# EAGLE board Module-WiFi-M0-v0.3-Board-1 (EAGLE 7.5.0)
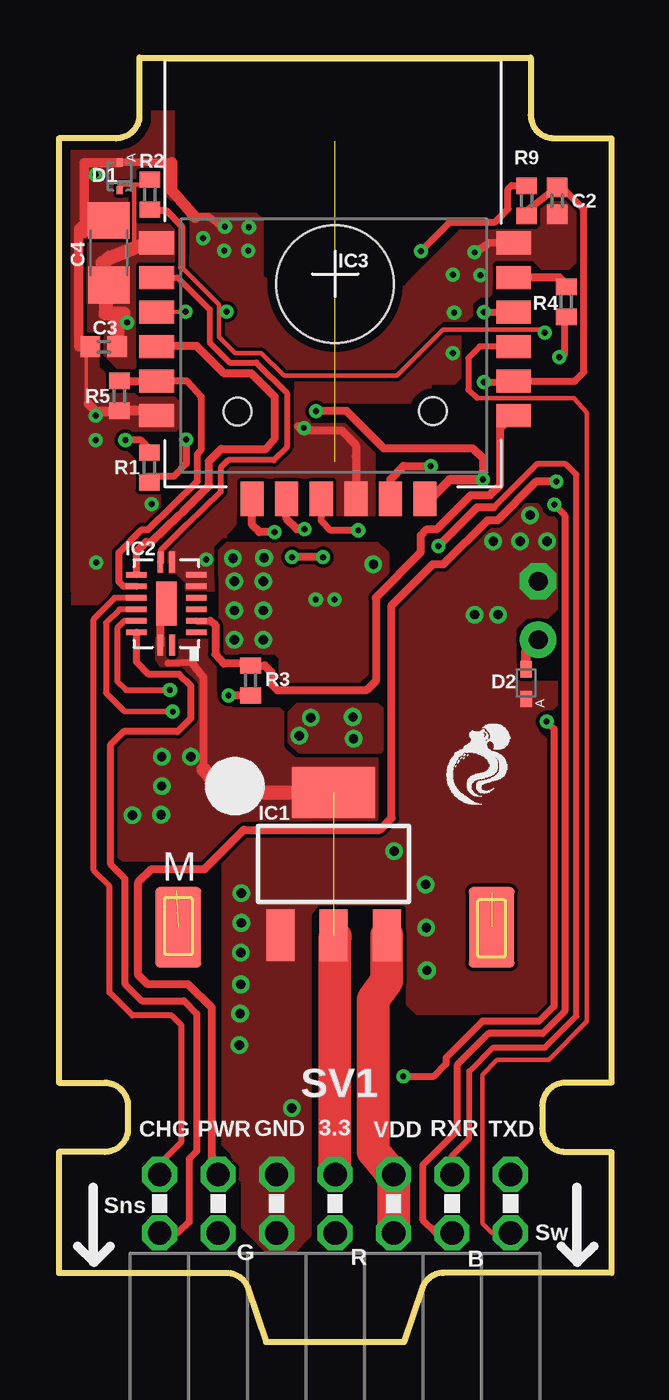
[diagram p0: board, top side]
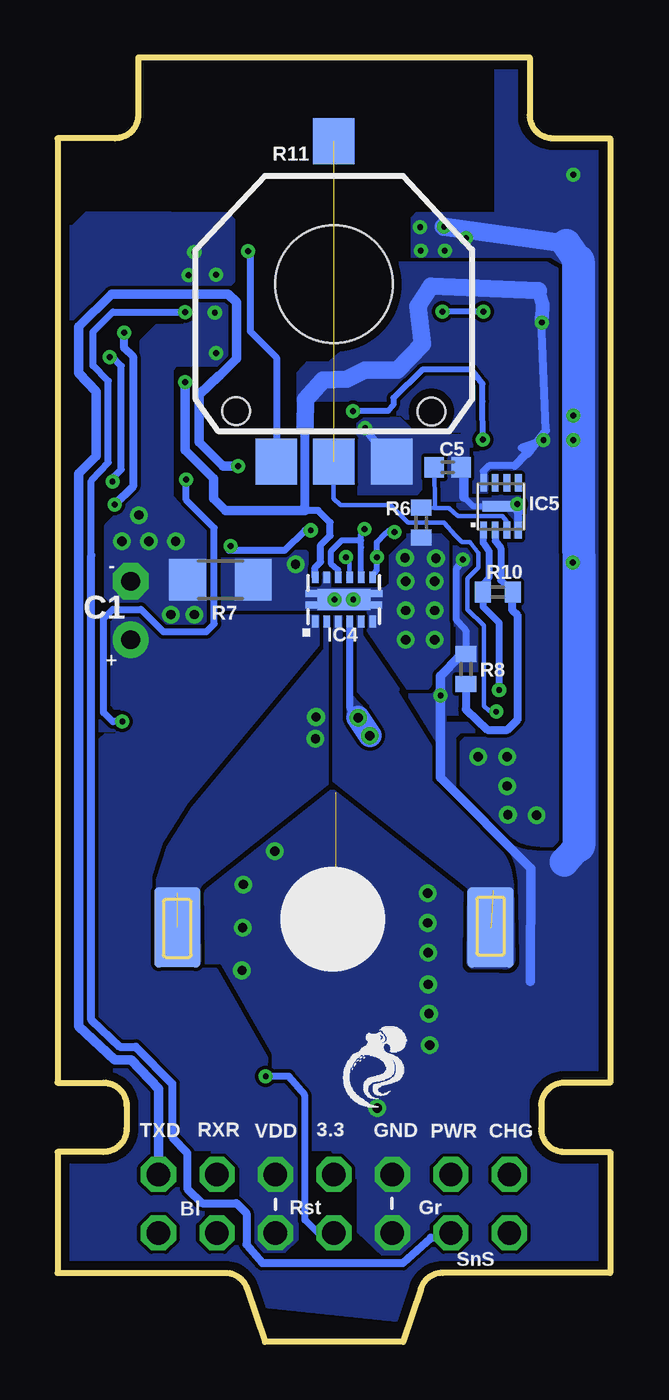
[diagram p1: board, bottom side, seen from below]

Size 24 x 55.75 mm. Coordinates in mm from the lower left corner, seen from the top.
Outline: 0,3 7.28,3 arc-72 8.23,2.32 9,0 15,0 15.77,2.32 arc-72 16.72,3 24,3 24,8.25 22,8.25 arc-90 21,9.25 21,10.25 arc-90 22,11.25 24,11.25 24,52.25 21.5,52.25 arc-90 20.5,53.25 20.5,55.75 3.5,55.75 3.5,53.25 arc-90 2.5,52.25 0,52.25 0,11.25 2,11.25 arc-90 3,10.25 3,9.25 arc-90 2,8.25 0,8.25 0,3
Copper layers (1*16): Top 0.0356mm / dielectric 1.5011mm / Bottom 0.0356mm
Design rules "oshpark-2layer": minimum track width 6mil, minimum drill 10mil, track to track 6mil, track to pad 6mil, pad to pad 6mil, via to via 6mil, smd to smd 6mil, copper to edge 15mil, drill to drill 6mil, minimum pad ring 7mil, minimum via ring 7mil, stop-mask expansion 2.5mil, vias tented up to drill 0mil, thermal gap 10mil
tRestrict: area 5.5,32.4 to 6.8,32.5; area 17.5,39.9 to 17.7,41.1; 119 lines
bRestrict: area 22,35.5 to 22.1,36.7; area 6.7,29.9 to 6.9,31; area 6.9,31 to 6.9,31.5; area 13,33.6 to 13.1,34.8; area 8.8,36.6 to 11.7,36.7; area 6.4,26.9 to 7.1,27.2; area 5.7,38.7 to 6,38.8; 82 lines

## Footprints (pad centres in the part's own frame; a part is rotated, then mirrored left to right if it is on the bottom)
CAP-SLEEP = drill 0.813 pad 1.575: + 1.27,0 | drill 0.813 pad 1.575 octagon: - -1.27,0
0402-CAP = smd 0.85 x 0.9: 1 -0.58,0; 2 0.58,0
1206 = smd 1.6 x 1.8: 1 -1.4,0; 2 1.4,0
SOD-923 = smd 0.36 x 0.25: A -0.6,0; C 0.6,0
SOD523 = smd 0.7 x 0.5: A 0.7,0; C -0.6,0
SOT223 = smd 1.219 x 2.235: 1 -2.311,-3.099; 2 0,-3.099; 3 2.311,-3.099 | smd 3.6 x 2.2: 4 0,3.099
DHVQFN16 = smd 0.24 x 0.9: 1 -0.25,1.8; 8 -0.25,-1.8; 9 0.25,-1.8; 16 0.25,1.8 | smd 0.9 x 0.24: 2 -1.3,1.25; 3 -1.3,0.75; 4 -1.3,0.25; 5 -1.3,-0.25; 6 -1.3,-0.75; 7 -1.3,-1.25; 10 1.3,-1.25; 11 1.3,-0.75; 12 1.3,-0.25; 13 1.3,0.25; 14 1.3,0.75; 15 1.3,1.25 | smd 0.9 x 1.9: EPAD 0,0
WT8266 = smd 1.5 x 1: 1 -7.75,1.35; 2 -7.75,-0.15; 3 -7.75,-1.65; 4 -7.75,-3.15; 5 -7.75,-4.65; 6 -7.75,-6.15; 13 7.75,-6.15; 14 7.75,-4.65; 15 7.75,-3.15; 16 7.75,-1.65; 17 7.75,-0.15; 18 7.75,1.35 | smd 1 x 1.5: 7 -3.6,-9.75; 8 -2.1,-9.75; 9 -0.6,-9.75; 10 0.9,-9.75; 11 2.4,-9.75; 12 3.9,-9.75
DSS12_P9X2 = smd 0.5 x 0.28: 1 -0.959,1.25; 2 -0.959,0.75; 3 -0.959,0.25; 4 -0.959,-0.25; 5 -0.959,-0.75; 6 -0.959,-1.25; 7 0.959,-1.25; 8 0.959,-0.75; 9 0.959,-0.25; 10 0.959,0.25; 11 0.959,0.75; 12 0.959,1.25 | smd 0.9 x 2.3: 13 0,0 | smd 0.305 x 0.61: 13@1 -0.25,1.36; 13@2 0.25,1.36; 13@3 -0.25,-1.36; 13@4 0.25,-1.37 | drill 0.254 pad 0.508: G1 0,0.406; G2 0,-0.406
DFN-8 = smd 0.3 x 0.75: 1 -0.75,-1.025; 2 -0.25,-1.025; 3 0.25,-1.025; 4 0.75,-1.025; 5 0.75,1.025; 6 0.25,1.025; 7 -0.25,1.025; 8 -0.75,1.025 | smd 1.6 x 0.45: PAD 0,0
MOTOR-NO_HOLE = smd 2 x 3.5: M1@1 6.8,0; M2@1 -6.81,0 | smd 2 x 3.5 bottom: M1@2 6.8,0; M2@2 -6.8,0 | smd 0.305 x 0.152: M1@3 6.8,1.5; M2@3 -6.9,1.6
R0402 = smd 0.7 x 0.9: 1 -0.65,0; 2 0.65,0
R1206 = smd 1.6 x 1.803: 1 -1.422,0; 2 1.422,0
ANGLE_SENSOR_MURATA = smd 1.8 x 2: 1 -2.5,-7.7; 2@1 0,-7.7; 2@2 0,6.2; 3 2.5,-7.7 | hole 5.1: 0,0 | hole 1.2: -4.24,-5.51; 4.24,-5.53
FE07-2W = drill 1.016 octagon: 1 -7.62,1.27; 2 -7.62,-1.27; 3 -5.08,1.27; 4 -5.08,-1.27; 5 -2.54,1.27; 6 -2.54,-1.27; 7 0,1.27; 8 0,-1.27; 9 2.54,1.27; 10 2.54,-1.27; 11 5.08,1.27; 12 5.08,-1.27; 13 7.62,1.27; 14 7.62,-1.27

## Placement (x,y rotation side)
C1  47uF, 25V  [CAP-SLEEP]  20.82,31.75 270 bottom
C2  0.1uF  [0402-CAP]  21.64,49.53 270 top
C3  0.1uF  [0402-CAP]  1.96,43.2 180 top
C4  100u  [1206]  2.18,47.28 90 top
C5  0.1uF  [0402-CAP]  7.06,37.96 0 bottom
D1  ESD9X5.0ST5G  [SOD-923]  2.65,50.59 270 top
D2  PMEG3005EB  [SOD523]  20.29,28.6 270 top
IC1  LM1117_3.3VSOT223  [SOT223]  11.94,20.75 0 top
IC2  74HC4051_DHVQFN16  [DHVQFN16]  4.67,32.05 180 top
IC3  WT8266  [WT8266]  12,46.36 0 top
IC4  DRV8835DSSR  [DSS12_P9X2]  11.57,32.23 90 bottom
IC5  LM358-DFN  [DFN-8]  4.75,36.27 0 bottom
M1  Round Motor  [MOTOR-NO_HOLE]  12,18 0 top
R1  30k  [R0402]  3.93,37.96 90 top
R2  3k  [R0402]  3.96,49.79 90 top
R3  30k  [R0402]  8.33,28.72 270 top
R4  30k  [R0402]  22.04,45.15 90 top
R5  3k  [R0402]  2.63,41.07 90 top
R6  30k  [R0402]  8.21,35.57 270 bottom
R7  0.02E, 1W  [R1206]  16.92,33.08 180 bottom
R8  3k  [R0402]  6.27,29.21 270 bottom
R9  30k  [R0402]  20.32,49.53 90 top
R10  30k  [R0402]  4.88,32.55 0 bottom
R11  10k  [ANGLE_SENSOR_MURATA]  12,45.92 0 bottom
SV1  [FE07-2W]  12,6 0 top

## Library data of the parts
C1 D1 IC2 IC3 M1 R11 = 1_ZeroUI
C2 C3 C5 = 1_ZeroUI; PROD_ID: CAP-12416
C4 = SparkFun-Passives
D2 = diode
IC1 = 1_ZeroUI; PROD_ID: VREG-08170
IC4 = 1_ZeroUI; MANUFACTURER_PART_NUMBER: drv8835_dss_12; VENDOR: Texas Instruments
IC5 = 1_ZeroUI; VARIANT: DFN
R1-R10 = rcl
SV1 = con-lsta; OC_FARNELL: unknown; OC_NEWARK: unknown

## Nets
3.3V: C2.1 C3.1 C4.1 D1.C IC1.2 IC1.4 IC2.16 IC2.EPAD IC3.1 IC3.14 IC4.12 IC5.8 R1.2 R2.2 R9.1 SV1.7
/RST: IC3.12 R1.1 SV1.8
CHG_ON: IC2.12 SV1.1
GND: C1.- C2.2 C3.2 C4.2 C5.2 D1.A D2.A IC1.1 IC2.6 IC2.7 IC2.8 IC3.6 IC3.10 IC3.18 IC5.4 IC5.PAD R3.2 R5.1 R7.2 R8.1 R11.3 SV1.5 SV1.6
LED-G: IC3.16 SV1.4
MOT-1: IC4.2 IC4.4 M1.M1@1 M1.M1@2 M1.M1@3
MOT-2: IC4.3 IC4.5 M1.M2@1 M1.M2@2 M1.M2@3
MOT_IN1: IC3.8 IC4.8 IC4.10
MOT_IN2: IC3.7 IC4.7 IC4.9
MOT_IRAW: IC4.6 IC4.11 IC4.13 IC4.13@1 IC4.13@2 IC4.13@3 IC4.13@4 IC4.G1 IC4.G2 R6.2 R7.1
MOT_ISNS: IC2.14 IC5.1 R10.1
MOT_POS: IC2.13 R11.2@1 R11.2@2
MUX_COM: IC2.3 IC3.13 R3.1
MUX_S0: IC2.11 IC3.5 R5.2
MUX_S1: IC2.10 IC3.4
MUX_S2: IC2.9 IC3.2
N$1: IC3.17 R4.2
N$10: C5.1 IC5.3 R6.1
N$17: R9.2 R11.1
N$18: IC5.2 R8.2 R10.2
PROGL/LED-B: IC3.3 R2.1 SV1.12
PWR_EN: R4.1 SV1.3
RXD/LED-R: IC3.9 SV1.11
SW_INT: IC3.15 SV1.14
TXD: IC3.11 SV1.13
VBATT_SENSE: IC2.15 SV1.2
VDD: C1.+ D2.C IC1.3 IC4.1 SV1.9 SV1.10

## Tracks (layer width: path | path; a pad name or v marks a point on that pad's centre or on a via)
3.3V  (via drill 0.25, 0.41)  (1 unrouted)
  Top 0.203: R2.2 3.91,50.24 3.27,50.24 3.28,50.16 | 3.28,50.16 3.25,50.24 3.25,50.22 2.65,50.22 D1.C | 3.28,50.16 3.28,47.59 3.81,47.8
  Top 0.305: 1.91,45.99 1.91,46.84 | 3.73,38.73 3.83,38.73 3.91,38.81 3.58,39.14 v2.9,39.14 | 4.75,29.46 5.77,29.51 | 12,17.59 IC1.2 | v18.47,41.66 19.41,41.66 19.45,41.71 IC3.14 22.41,41.71 22.81,42.1 22.81,49.17 21.86,50.11 C2.1 20.43,49.18 20.42,48.97 20.39,48.94 R9.1
  Top 0.356: C4.1 1.91,45.99 | 3.69,47.66 3.81,47.8 | R1.2 3.73,38.73 | IC2.16 4.42,31.8 IC2.EPAD | 5.77,29.51 6.27,28.85 6.27,24.87
  Top 0.406: C4.1 2.03,46.37 | 2.82,44.66 v2.97,44.25
  Top 0.61: 1.91,46.84 2.21,47.07 3.69,47.66 IC3.1 | 2.03,46.37 2.03,44.65 2.82,44.66 | v2.97,44.25 2.54,44.65 C3.1 | 6.27,24.87 7.16,23.85 IC1.4
  Top 1.422: SV1.7 12,17.59
  Bottom 0.305: IC4.12 12.82,33.61 12.57,33.86 12.57,34.59 12.17,35 12.17,35.57 12.69,36.09 13.26,36.09 13.26,36.14 | 2.97,44.43 v2.97,44.25 | v2.9,39.14 3.86,38.81 3.58,38.53 3.58,38.56 | 4.15,38.04 5.27,38.04 5.51,37.8 5.51,37.21 IC5.8
  Bottom 0.356: v2.97,44.25 3,44.4 2.79,39.57 3.58,38.56 3.63,38.56 4.15,38.04
  Bottom 0.381: 13.26,36.14 13.26,39.75
  Bottom 0.406: 13.26,36.09 16.7,36.09 17.22,36.62 17.22,37.47 18.47,38.71 v18.47,41.66
  Bottom 0.61: 3.12,45.64 2.95,45.03 2.97,44.43
  Bottom 0.762: 13.26,39.75 13.23,40.89 12.47,41.76 11.43,41.78 10.64,42.19 9.25,42.19 8.16,43.32 8.36,44.96 7.78,45.82 3.12,45.64
  other vias: 3.2,22.86 4.47,25.4 4.47,24.13 4.45,22.89 5.74,25.4
  pour Top (no thermals): 13.79,22.68 13.82,22.86 13.82,25.3 10.26,25.3 9.73,25.83 9.73,27.68 8.3,27.7 7.06,29.18 6.63,29.62 6.63,30.51 6.68,30.56 0.1,30.51 0.13,25.53 -0.05,25.78 -0.05,20.42 4.7,20.4 6.14,20.75 8.03,22.63
  pour Bottom (no thermals): -0.2,45.13 -0.15,23.43 arc85 2.81,21.58 arc50 4.65,22.29 6.23,23.92 7.55,25.49 7.44,25.81 7.4,28.65 6.6,29.47 6.02,29.49 6.15,40.89 13.61,40.89 13.61,46.81 2.75,46.81
  pour Top (no thermals): 5.11,48.41 1.09,48.41 1.09,43.83 2.68,42.24 5.31,42.21 5.31,48.39
/RST  (via drill 0.25)
  Top 0.305: v14.96,11.53 16.29,11.53 16.82,12.06 16.82,12.34 18.4,13.92 20.86,13.92 21.5,14.56 21.5,26.61 21.3,26.8 v21.19,26.92 | 16.09,36.41 IC3.12 | v5.54,39.17 5.54,38.12 4.98,37.57 3.85,37.57 R1.1
  Top 0.356: v11.18,40.41 12.5,40.41 14.12,38.79 16.31,38.79 17.98,38.79 18.41,38.35 v18.41,37.44
  Top 0.406: 16.09,36.41 16.09,36.54 16.99,37.44 v18.41,37.44
  Bottom 0.254: v5.54,39.17 5.55,40.82 5.54,41.59 6.03,42.2 8.17,42.2 9.42,40.97 9.42,40.66 9.65,40.41 v11.18,40.41
  Bottom 0.305: SV1.8 12.68,4.73 13.23,5.28 13.26,5.28 13.26,10.69 13.97,11.53 v14.96,11.53 | v21.19,26.92 21.35,26.92 21.6,26.92 22,27.32 22,31.4 21.6,31.8 20.38,31.8 19.41,30.83 17.54,30.83 17.2,31.16 17.2,35.33 18.41,36.55 v18.41,37.44
CHG_ON
  Top 0.254: IC2.12 2.43,32.3 1.52,31.37 1.52,20.47 2.21,19.79 2.21,15.16 3.2,14.17 4.9,14.17 5.33,13.74 5.33,8.69 4.38,7.73 SV1.1
GND  (via drill 0.25, 0.41)
  Top 0.127: 1.28,40.73 1.19,40.82 | 1.19,43 C3.2
  Top 0.152: 1.19,40.82 1.19,43
  Top 0.254: C4.2 1.51,48.92
  Top 0.305: v18.06,47.3 18.08,47.27 | v7.21,48.41 7.09,48.39 6.53,48.84
  Top 0.356: 4.04,40.42 IC3.6 | R5.1 2.53,40.39 | v10.64,39.67 10.39,39.75 10.57,39.57 12.27,39.57 12.9,38.94 12.9,38.43 IC3.10 | IC3.18 18.69,47.7 18.08,47.27 | 6.53,48.84 5.92,48.82 | 4.89,51.18 4.62,51.18 2.62,51.21 D1.A | R3.2 v7.37,28.07
  Top 0.406: C3.2 0.86,43.2 0.86,48.33 1.51,48.92 1.12,48.13 1.11,49.31 1.11,50.73 1.11,51.19 D1.A | 4.04,40.42 R5.1 | 2.53,40.39 1.63,40.39 1.28,40.73
  Top 0.508: 5.92,48.82 4.89,49.99 4.89,51.18
  Bottom 0.254: IC5.PAD 5.94,36.27 6.35,36.68
  Bottom 0.305: v6.4,33.96 6.69,33.54 6.69,31.36 6.35,30.99 6.27,30.89 R8.1
  Bottom 0.356: v10.64,39.67 10.24,39.12 9.88,38.83 | IC5.4 4,36.03 4.24,36.27 IC5.PAD
  Bottom 0.406: R11.3 9.88,38.83 9.75,38.1 | 3.48,15.65 3.45,20.55 7.37,24.51 v7.37,28.07 7.37,28.91 6.55,29.74 6.22,29.88 R8.1 | 6.35,36.68 6.35,38.08 C5.2 | v4.04,36.37 4.01,36.37 4,36.03
  Bottom 0.813: v7.21,48.41 1.91,47.68
  Bottom 1.27: 1.91,47.68 1.4,46.91 | 1.37,21.54 1.99,20.84
  Bottom 1.422: 1.4,46.91 1.37,21.54
  other vias: 7.92,19.48 15.99,16.13 7.9,15.52 14.57,21.3 7.87,14.25 7.9,16.89 7.92,18.19 17.12,46.33 18.31,46.3 17.12,42.93 8.26,48.39 8.23,47.37 7.19,47.37 15.93,19.86 20.47,35.89 21.21,34.75 1.6,39.14 1.6,50.67 1.63,33.83 6.27,47.9 10.12,10.15 7.85,12.88 15.96,17.98 18.87,34.75 17.17,44.68 1.6,40.21 20.04,34.75 18.06,31.57 19.08,31.57
  pour Bottom (rank 6, no thermals): 0,0 24.13,2.54 24.13,58.42 0,55.88
  pour Top (rank 6, no thermals): 7.11,3.81 11.15,3.81 11.25,3.83 22.58,3.95 21.73,32.84 14.61,32.82 14.58,23.09 13.26,22 7.11,22
  pour Top (rank 2, no thermals): 24.56,39.32 15.44,39.32 15.44,29.29 24.56,29.29
  pour Top (isolate 0.025, rank 2, no thermals): -5.08,53.34 30.48,53.34 30.53,35.15 15.32,35.03 7.47,35.03 6.86,34.42 6.83,34.42 6.83,31.34 -5.03,31.34
LED-G  (via drill 0.25)
  Top 0.305: v18.47,44.7 IC3.16
  Bottom 0.305: 22.53,34.14 22.53,37.39 21.79,38.17 21.79,41.71 22.45,42.37 22.45,43.85 21.6,44.7 v18.47,44.7
  Bottom 0.356: 22.53,34.14 22.53,13.97 21.3,12.81 20.6,12.81 19.02,11.2 19.02,8.89 18.36,8.2 18.36,6.66 17.73,6.02 16.23,6.02 15.8,5.59 15.8,4.22 15.11,3.43 9.01,3.43 7.79,4.52 7.1,4.55 SV1.4
MOT-1  (via drill 0.41)  (2 unrouted)
  Bottom 0.305: IC4.4 11.32,27.53 v10.95,27.1
  Bottom 0.356: M1.M1@2 18.8,18.03
  Bottom 1.016: v10.95,27.1 v10.44,26.31
  other vias: 12.8,26.19 12.78,27.13
  pour Bottom (rank 3, no thermals): 12.19,31.57 12.19,24.31 17.71,19.9 arc-52 17.89,19.54 17.84,16.54 arc90 18.07,16.3 19.53,16.3 arc89 19.74,16.58 19.8,20.02 arc17 19.73,20.36 19.45,21.3 arc20 19.06,22.06 15.49,26.82 12.58,30.2 12.5,30.5 12.5,31.57
  pour Top (rank 4, no thermals): 9.88,27.69 14.2,27.69 14.2,25.37 9.88,25.4
  pour Bottom: 11.23,28.07 10.64,27.43 11.25,27.08 arc120 11.39,27.16 11.39,28.12 11.25,28.1 arc81
MOT-2  (2 unrouted)
  Bottom 0.254: 5.4,18 5.5,18
  pour Bottom (rank 2, no thermals): 6.15,19.72 6.17,16.63 arc-89 5.97,16.25 4.65,16.24 arc-91 4.19,16.56 4.24,19.84 4.33,20.37 arc-19 4.7,21.23 10.67,30.61 10.67,31.52 11.05,31.52 12,31.54 12,24.36
MOT_IN1  (via drill 0.25)
  Top 0.356: v10.67,35.28 10.34,35.28 9.9,35.72 IC3.8
  Bottom 0.254: IC4.10 11.82,33.51 12.12,33.76 12.12,34.34 11.66,34.8 10.82,34.8 10.82,35.08 | 10.82,35.08 v10.67,35.28 | IC4.8 10.82,34.49 10.82,35.08
MOT_IN2  (via drill 0.25)
  Top 0.356: v11.48,34.06 v10.13,34.06 | v9.37,35.15 8.71,35.15 8.4,35.47 IC3.7
  Bottom 0.203: IC4.7 10.32,33.27 | IC4.9 11.32,33.95 v11.48,34.06
  Bottom 0.254: 10.32,33.27 10.13,33.5 v10.13,34.06 10.14,34.72 9.75,35.1 9.63,35.2 arc-37 v9.37,35.15
MOT_IRAW  (via drill 0.41)
  other vias: 13.67,33.76 8.92,34.04 8.89,30.48 8.89,33.02 7.57,34.01 7.62,33.02 7.62,31.75 8.89,31.75 7.62,30.48
  pour Bottom (no thermals): 17.17,35.05 6.73,35.08 6.81,34.32 6.65,29.74 6.85,29.74 7.68,28.93 7.89,28.31 8.98,28.25 10.49,30.71 10.49,31.8 17.2,31.8
  pour Top (no thermals): 15.27,34.92 7.49,34.92 6.99,34.37 7.04,29.77 8.51,28.02 14.45,28.04 14.45,31.88 15.33,32.72
MOT_ISNS  (via drill 0.25)
  Top 0.254: IC2.14 2.85,31.3 2.54,30.99 2.54,28.68 2.92,28.3 v4.83,28.3
  Bottom 0.203: 5.51,35.23 IC5.1
  Bottom 0.305: R10.1 5.51,32.2 5.51,31.9 4.83,31.22 v4.83,28.3 | 5.53,32.85 5.26,33.2 5.26,34.31 5.51,34.7 5.51,35.23
  Bottom 0.356: R10.1 5.53,32.85
MOT_POS  (via drill 0.25)  (1 unrouted)
  Top 0.254: IC2.13 2.64,31.8 2.06,31.22 2.06,28.17 2.85,27.38 v4.95,27.36
  Bottom 0.203: v4.95,27.36 5.26,27.38 5.49,27.61 5.49,31.09 6.2,31.8 6.2,33.15 5.72,33.6 5.73,34.25 6.1,34.72 6.45,34.72 6.73,35 7.21,35.56 8.79,35.56 9.55,36.32 11.72,36.32 12.01,36.62 12.01,38.21
  Bottom 0.305: 11.99,38.23 R11.2@1
  Bottom 0.356: 12.01,38.21 R11.2@1
MUX_COM
  Top 0.305: IC2.3 6.57,31.3
  Top 0.356: 6.57,31.3 6.81,31.11 6.81,29.84 7.16,29.44 8.25,29.44 8.28,29.46 R3.1 8.94,29.36 9.22,29.08 9.22,28.57 9.5,28.3 13.38,28.3 13.77,28.69 13.77,32.31 15.72,34.29 15.72,35.01 16,35.28 16.42,35.28 17.89,36.75 18.73,36.75 19.18,37.2 19.18,39.67 19.96,40.49 20.24,39.99 IC3.13
MUX_S0
  Top 0.305: IC2.11 2.81,32.8 2.62,32.99 2.62,34.27 3.61,35.26 3.85,35.26 arc45 3.87,35.26 6.02,37.36 6.02,38.53 6.2,38.76 6.2,41.02 5.56,41.71 IC3.5
  Top 0.356: R5.2 IC3.5
MUX_S1
  Top 0.305: IC2.10 3.37,34.31
  Top 0.356: 3.37,34.31 3.79,34.72 4.01,34.72 5.24,35.89 5.38,36.02 6.53,37.16 6.53,37.47 6.53,38.23 7.06,38.76 8.99,38.76 9.39,39.23 9.39,41.02 8.37,42.04 7.19,42.04 5.99,43.23 4.28,43.23 IC3.4
MUX_S2
  Top 0.254: IC3.2 5.16,46.21 6.55,44.81 6.55,43.38 7.42,42.52 8.58,42.52 9.91,41.19 9.91,38.85 9.34,38.28 7.36,38.28 7.04,37.95 7.04,36.91 5.56,35.48 4.45,34.37 4.45,33.87
  Top 0.305: 4.45,33.87 IC2.9
N$1
  Top 0.356: R4.2 22.06,45.88 21.74,46.2 IC3.17
N$10
  Bottom 0.203: IC5.3 4.5,35.61 4.67,35.84 6.62,35.84 7.01,36.2 7.63,36.2 | 7.63,36.2 R6.1 | C5.1 7.62,36.27 7.63,36.2
N$17  (via drill 0.25)
  Top 0.305: v15.72,47.35 16.99,48.62 18.95,48.62 19.51,49.17 19.51,50.04 19.66,50.19 R9.2
  Top 0.406: R9.2
  Bottom 0.305: 15.64,47.31 15.64,43.87 14.5,42.73 R11.1
  Bottom 0.406: v15.72,47.35 15.64,47.31
N$18
  Bottom 0.305: IC5.2 5,34.77 4.75,34.47 4.75,33.06 R10.2
  Bottom 0.356: R8.2 6.27,27.45 5.33,26.57 4.47,26.57 4.01,27.03 4.01,31.52 4.24,31.75 4.24,32.54 R10.2
PROGL/LED-B  (via drill 0.25)
  Top 0.203: 21.16,43.94 16.69,43.94 14.68,41.94 9.78,41.94 8.79,42.93 7.65,42.93 6.96,43.62 6.96,44.73 | 6.96,44.73 6.96,45.03 5.33,46.66 | IC3.3 v5.51,44.73 | v7.29,44.73 6.96,44.73
  Top 0.254: 4.15,44.93 IC3.3
  Top 0.305: 4.1,49.12 4.65,49.12 5.33,48.44 5.33,46.66 | SV1.12 16.38,4.73 15.82,5.28 15.82,7.69 17.3,9.16 17.3,12.02 18.67,13.39 21.02,13.39 21.97,14.34 21.97,35.89 v21.51,36.35 | v21.11,43.81 21.18,43.81 21.16,43.94
  Top 0.356: R2.1 4.1,49.12
  Bottom 0.254: v5.51,44.73 v7.29,44.73
  Bottom 0.356: v21.51,36.35 20.73,37.13 20.73,42.77 21.11,43.13 v21.11,43.81
PWR_EN  (via drill 0.25)
  Top 0.305: v21.74,42.75 arc99 21.97,42.95 21.97,44.25 22.1,44.32 21.95,44.39 R4.1
  Top 0.356: SV1.3 6.92,7.76 6.66,8.03 6.66,14.5 5.61,15.52 3.86,15.52 3.45,15.93 3.45,19.96 4.04,20.52 6.34,20.52 8.03,22.23 13.95,22.23 14.45,22.73 14.45,31.97 16.24,33.76 16.71,33.76 18.62,35.66 19.05,35.66 20.73,37.34 v21.61,37.34
  Bottom 0.305: v21.61,37.34 21.52,37.44 21.57,37.54 21.23,37.87 21.23,42.37 21.64,42.8 v21.74,42.75
RXD/LED-R  (via drill 0.25)
  Top 0.254: SV1.11 17.07,8.07 17.83,8.83 17.83,11.75 18.86,12.78 21.11,12.78 22.48,14.14 22.48,37.64 22.02,38.1 20.75,38.1 19.71,37.05 18.88,36.22
  Top 0.305: v13.01,35.23 11.81,35.23 11.4,35.64 11.4,36.47 IC3.9
  Top 0.356: 18.88,36.22 18.16,36.22 v16.48,34.54
  Bottom 0.305: v16.48,34.54 16.56,34.37 14.12,34.37 13.26,35.23 v13.01,35.23 13.01,35.2
SW_INT
  Top 0.203: 18.16,40.97 22.38,40.97 22.94,40.33 22.94,13.92 21.29,12.24 19.03,12.24 18.39,11.6 18.39,5.16 18.82,4.73 SV1.14
  Top 0.254: IC3.15 18.29,43.21 17.78,42.7 17.78,41.33 18.16,40.97
TXD  (via drill 0.25)
  Top 0.356: IC3.11 14.4,37.44 14.96,38.02 v16.15,38.02
  Top 0.406: IC3.11 14.4,36.12
  Bottom 0.305: 17.86,39.62 17.86,39.65
  Bottom 0.406: SV1.13 19.62,10.98 20.8,12.24 21.51,12.24 23.09,13.69 23.09,37.69 22.33,38.46 22.33,41.25 23.09,42.06 23.09,44.06 21.66,45.49 16.59,45.49 16.23,45.13 16.23,42.67 16.97,41.94 16.99,41.94 17.86,41.12 17.86,39.65 | v16.15,38.02 16.81,38.02 17.86,39.07 17.86,39.62
VBATT_SENSE
  Top 0.305: IC2.15 3.38,29.52 3.91,28.98 5.23,28.98 5.74,28.47 5.74,27.08 5.16,26.49 2.82,26.49 2.23,25.91 2.23,20.75 2.87,20.12 2.87,15.54 3.61,14.81 5.44,14.81 5.99,14.25 5.99,8.28 5.66,7.95 5.66,5.21 5.18,4.75 4.4,4.75
  Top 0.356: 4.4,4.75 SV1.2
VDD
  Top 0.406: D2.C 20.3,29.98 C1.+
  Top 1.422: IC1.3 14.25,15.67 13.66,14.86 13.66,8.26 14.59,7.13 SV1.9 SV1.10
  pour Bottom (rank 2, no thermals): 13.18,4.11 13.23,4.17 13.31,10.85 14,11.53 14.96,11.51 14.94,12.32 15.01,12.47 17.12,16.18 19.54,16.18 arc90 19.96,16.53 19.96,20.24 19.49,21.72 18.48,23.31 12.7,30.25 12.7,31.5 16.74,31.5 17.73,30.73 19.63,30.73 20.68,31.78 22.81,31.72 22.83,31.7 22.83,10.41 22.91,10.34 22.91,3.96 22.89,3.94 13.34,3.94

## Text on the board
tPlace: M
tNames: CHG | PWR | GND | 3.3 | VDD | RXR | TXD | Sns | G | Sw | R | B
bNames: - | + | CHG | PWR | GND | 3.3 | VDD | RXR | TXD | Gr | Rst | Bl | SnS
Reference: TOP PCB
tDocu: CHG_ON PWR_EN GND 3.3V Vdd Rxd TxD / Vbat LG GND DTR Vdd ProgL SWINT